# Altium PCB 2 Cell Battery Case.pcbdoc
Units mm, origin at the board's own origin, x right, y up, seen from the top; angles counter-clockwise.
Board outline 89.76 x 52.66 mm, 2 copper layers (Top Layer, Bottom Layer); 1 components, 0 nets, 4 pads, 0 vias.
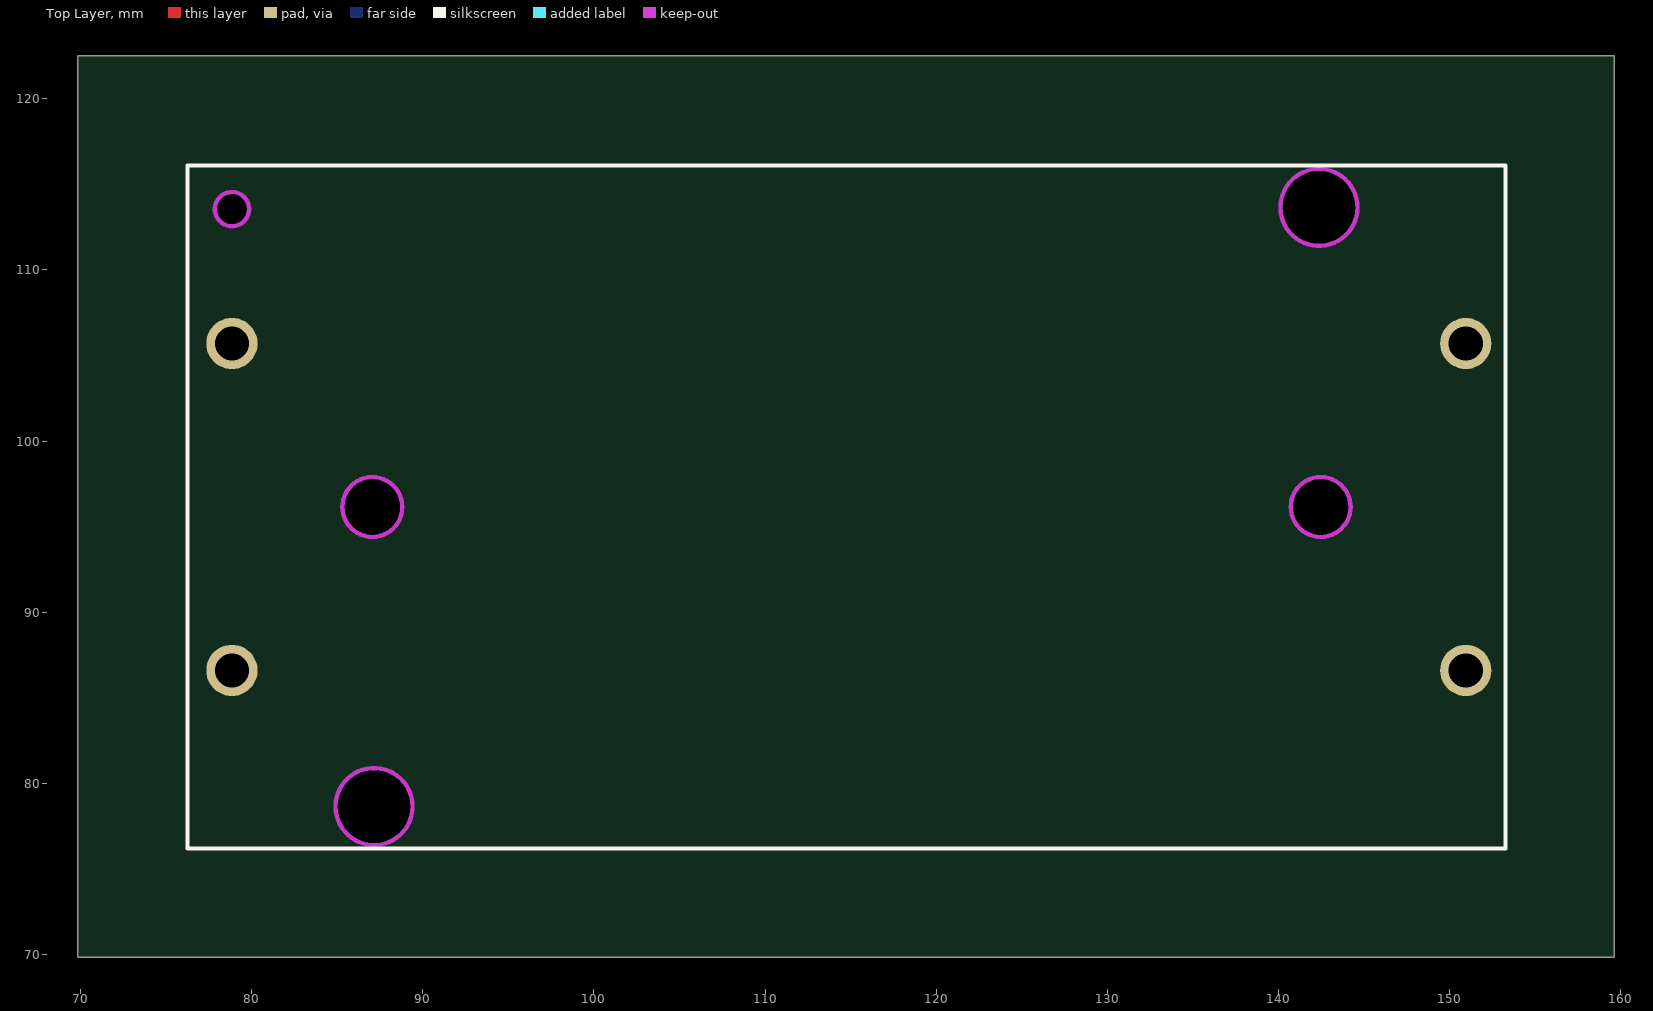
[diagram p0: Top Layer view]
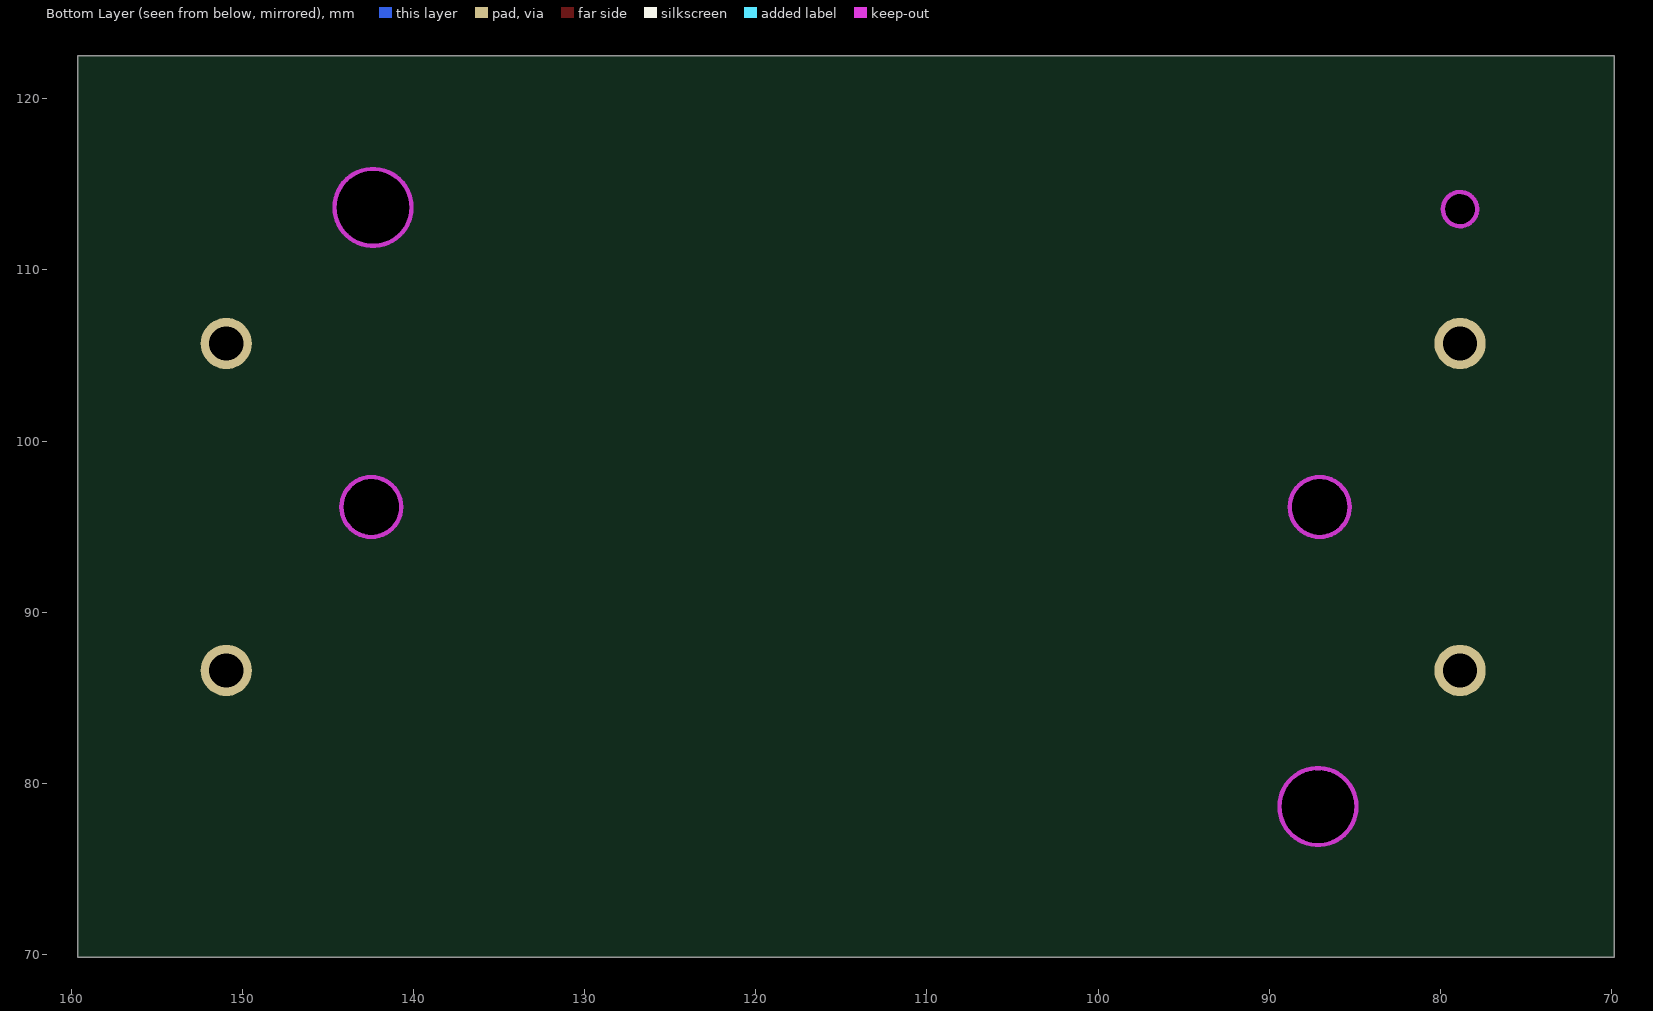
[diagram p1: Bottom Layer view, seen from below]

## Layer stack, top to bottom
Top Layer: signal copper (thickness not stored)
Dielectric: dielectric 0.32, FR-4, Dk 4.8
Bottom Layer: signal copper (thickness not stored)

## Board outline
159.61,69.85 69.85,69.85 69.85,122.51 159.61,122.51

## Design rules (kind name [scope] priority, off if disabled: settings)
Clearance safeClearance [All] p1: gap=0.178 ignorepadtopadclearanceinfootprint=FALSE except(0.152: Track-Track Track-SMDPad SMDPad-SMDPad Track-THPad SMDPad-THPad THPad-THPad Track-Via SMDPad-Via THPad-Via Via-Via Track-Fill SMDPad-Fill THPad-Fill Via-Fill Fill-Fill Track-Region SMDPad-Region THPad-Region Via-Region Fill-Region Region-Region Track-Poly SMDPad-Poly THPad-Poly Via-Poly Fill-Poly Region-Poly Poly-Poly Track-Text SMDPad-Text THPad-Text Via-Text Fill-Text Region-Text Poly-Text Text-Text; 0.175: Track-Hole SMDPad-Hole THPad-Hole Via-Hole Fill-Hole Region-Hole Poly-Hole Text-Hole Sheet-Hole; 0.3: Track-Sheet SMDPad-Sheet THPad-Sheet Via-Sheet Fill-Sheet Region-Sheet Poly-Sheet Text-Sheet)
DiffPairsRouting differentialPair [All] p1: maxuncoupledlength=10 minlimit=6 maxlimit=50 mostfreqgap=6 toplayer_minwidth=5 toplayer_prefwidth=10 toplayer_maxwidth=100 bottomlayer_minwidth=5 bottomlayer_prefwidth=10 bottomlayer_maxwidth=100
PasteMaskExpansion pasteMaskExpansion [All] p1:
PlaneConnect innerPlane [All] p1: planeconnectstyle=Relief reliefexpansion=0.508 reliefentries=4 reliefconductorwidth=0.254 reliefairgap=0.254
PolygonConnect copperRegion [All] p1: connectstyle=Relief reliefentries=4 reliefconductorwidth=10 polygonreliefangle="90 Angle" airgapwidth=10
RoutingVias viaSize [All] p1: viastyle="Through Hole" holewidth=12.0078 minholewidth=11.811 maxholewidth=236.2204 width=24.0158 minwidth=19.685 maxwidth=393.7008
SolderMaskExpansion solderMaskExpansion [All] p1: useseparateexpansions=TRUE expansion=2 expansionbottom=2
Width trackWidth [All] p1: maxlimit=100 minlimit=5 preferedwidth=10

## Components (designator, comment, footprint, x,y, rotation, side; value= is the part's Value field where it differs from the comment)
? "BAT-TH_L77.0-W39.9_BH-18650-A1BJ021" BAT-TH_L77.0-W39.9_BH-18650-A1BJ021 114.897,96.15 r0 top

## Footprints (in the part's own frame and the unit in brackets; to place one, negate y for a bottom-side part, rotate by r counter-clockwise, add the part's x,y. Pads: shape width x height; smd on the part's side, far side on the other; paste and mask are expansions set on the pad)
BAT-TH_L77.0-W39.9_BH-18650-A1BJ021 [mm]
  round 3 hole 2: 1(-36.037,9.55) 2(-36.037,-9.55) 3(36.037,-9.55) 4(36.037,9.55)
  Multi-Layer board cut-out: -35.037,17.4 -35.136,17.834 -35.414,18.182 -35.815,18.375 -36.26,18.375 -36.661,18.182 -36.938,17.834 -37.037,17.4 -37.037,17.4 -36.903,16.9 -36.537,16.534 -36.037,16.4 -35.537,16.534 -35.171,16.9 -35.037,17.4
  Multi-Layer board cut-out: -25.487,-17.5 -25.792,-16.379 -26.615,-15.56 -27.737,-15.261 -28.859,-15.56 -29.682,-16.379 -29.987,-17.5 -29.987,-17.5 -29.682,-18.62 -28.859,-19.44 -27.737,-19.739 -26.616,-19.44 -25.792,-18.62 -25.487,-17.5
  Multi-Layer board cut-out: 29.712,17.5 29.407,18.62 28.584,19.44 27.462,19.739 26.34,19.44 25.517,18.62 25.212,17.5 25.212,17.5 25.517,16.38 26.34,15.56 27.462,15.261 28.584,15.56 29.407,16.379 29.712,17.5
  Multi-Layer board cut-out: -26.088,0 -26.261,0.759 -26.746,1.368 -27.448,1.706 -28.227,1.706 -28.929,1.368 -29.414,0.759 -29.588,0 -29.588,0 -29.353,-0.875 -28.713,-1.516 -27.838,-1.75 -26.963,-1.516 -26.322,-0.875 -26.088,0
  Multi-Layer board cut-out: 29.312,0 29.139,0.759 28.654,1.368 27.952,1.706 27.173,1.706 26.471,1.368 25.986,0.759 25.812,0 25.812,0 26.047,-0.875 26.687,-1.516 27.562,-1.75 28.437,-1.516 29.078,-0.875 29.312,0
  Multi-Layer keep-out circle w0.254: c-36.037,17.4 r1
  Multi-Layer keep-out circle w0.254: c-27.737,-17.5 r2.25
  Multi-Layer keep-out circle w0.254: c27.462,17.5 r2.25
  Multi-Layer keep-out circle w0.254: c-27.838,0 r1.75
  Multi-Layer keep-out circle w0.254: c27.562,0 r1.75
  silkscreen extent -38.64,-19.95 38.36,19.95

## Nets (pads, with @x,y where several pads share a name; then routed paths per layer and width w, separated by ;. In a path a pad name is that pad's centre, name@x,y a point inside that pad or via, vN(x,y) a via of type N, cw(c..) or ccw(c..) an arc to the next point about the centre after c; other vN are vias at no path point)
pads on no net: ?.1 ?.2 ?.3 ?.4